# EAGLE board wheelout-rtm (EAGLE 7.6.0)

Size 29.97 x 29.97 mm. Coordinates in mm from the lower left corner, seen from the top.
Outline: circle at 14.99,25.15 radius 2.51
Outline: circle at 6.1,20.07 radius 2.51
Outline: circle at 6.1,9.59 radius 2.51
Outline: circle at 14.99,4.83 radius 2.51
Outline: circle at 23.88,9.91 radius 2.51
Outline: circle at 23.88,20.07 radius 2.51
Outline: circle at 14.99,14.99 radius 14.99
Copper layers (1*16): Top 0.0356mm / dielectric 1.5011mm / Bottom 0.0356mm
Design rules "LaenPCBOrder *": minimum track width 6mil, minimum drill 13mil, track to track 6mil, track to pad 6mil, pad to pad 6mil, via to via 6mil, smd to smd 6mil, copper to edge 15mil, drill to drill 6mil, minimum pad ring 7mil, minimum via ring 7mil, stop-mask expansion 4mil, vias tented up to drill 30mil, thermal gap 10mil
Net classes: 0 default: width 0.381 mm, drill 0.381 mm, clearance 0.305 mm; 1 GND: width 0.508 mm, drill 0.381 mm, clearance 0.305 mm; 2 pwr: width 0.508 mm, drill 0.381 mm, clearance 0.305 mm

## Footprints (pad centres in the part's own frame; a part is rotated, then mirrored left to right if it is on the bottom)
MOUNTINGHOLE_2.0_PLATED = drill 2.2 pad 3: P$1 0,0
MOUNTINGHOLE_3.0_PLATED_VIAS = drill 3 pad 6.452: P$1 0,0 | drill 0.4: P$2 0,2.5; P$3 2.5,0; P$4 0,-2.5; P$5 -2.5,0; P$6 -1.8,1.7; P$7 -1.8,-1.7; P$8 1.8,-1.7; P$9 1.8,1.7

## Placement (x,y rotation side)
U$1  MOUNTINGHOLE2.0  [MOUNTINGHOLE_2.0_PLATED]  21.18,25.7 0 top
U$2  MOUNTINGHOLE2.0  [MOUNTINGHOLE_2.0_PLATED]  21.18,4.27 0 top
U$3  MOUNTINGHOLE2.0  [MOUNTINGHOLE_2.0_PLATED]  8.79,4.19 0 top
U$4  MOUNTINGHOLE2.0  [MOUNTINGHOLE_2.0_PLATED]  27.37,14.99 0 top
U$7  MOUNTINGHOLE2.0  [MOUNTINGHOLE_2.0_PLATED]  8.79,25.7 0 top
U$8  MOUNTINGHOLE2.0  [MOUNTINGHOLE_2.0_PLATED]  2.6,14.99 0 top
U$15  MOUNTINGHOLE  [MOUNTINGHOLE_3.0_PLATED_VIAS]  14.99,14.99 0 top

## Library data of the parts
U$1-U$4 U$7 U$8 U$15 = microbuilder; BOM: EXCLUDE